# Altium PCB PCB1.PcbDoc
Units mil, origin at the board's own origin, x right, y up, seen from the top; angles counter-clockwise.
Board outline 4135 x 5145 mil, 2 copper layers (Top Layer, Bottom Layer); 112 components, 91 nets, 432 pads, 86 vias.
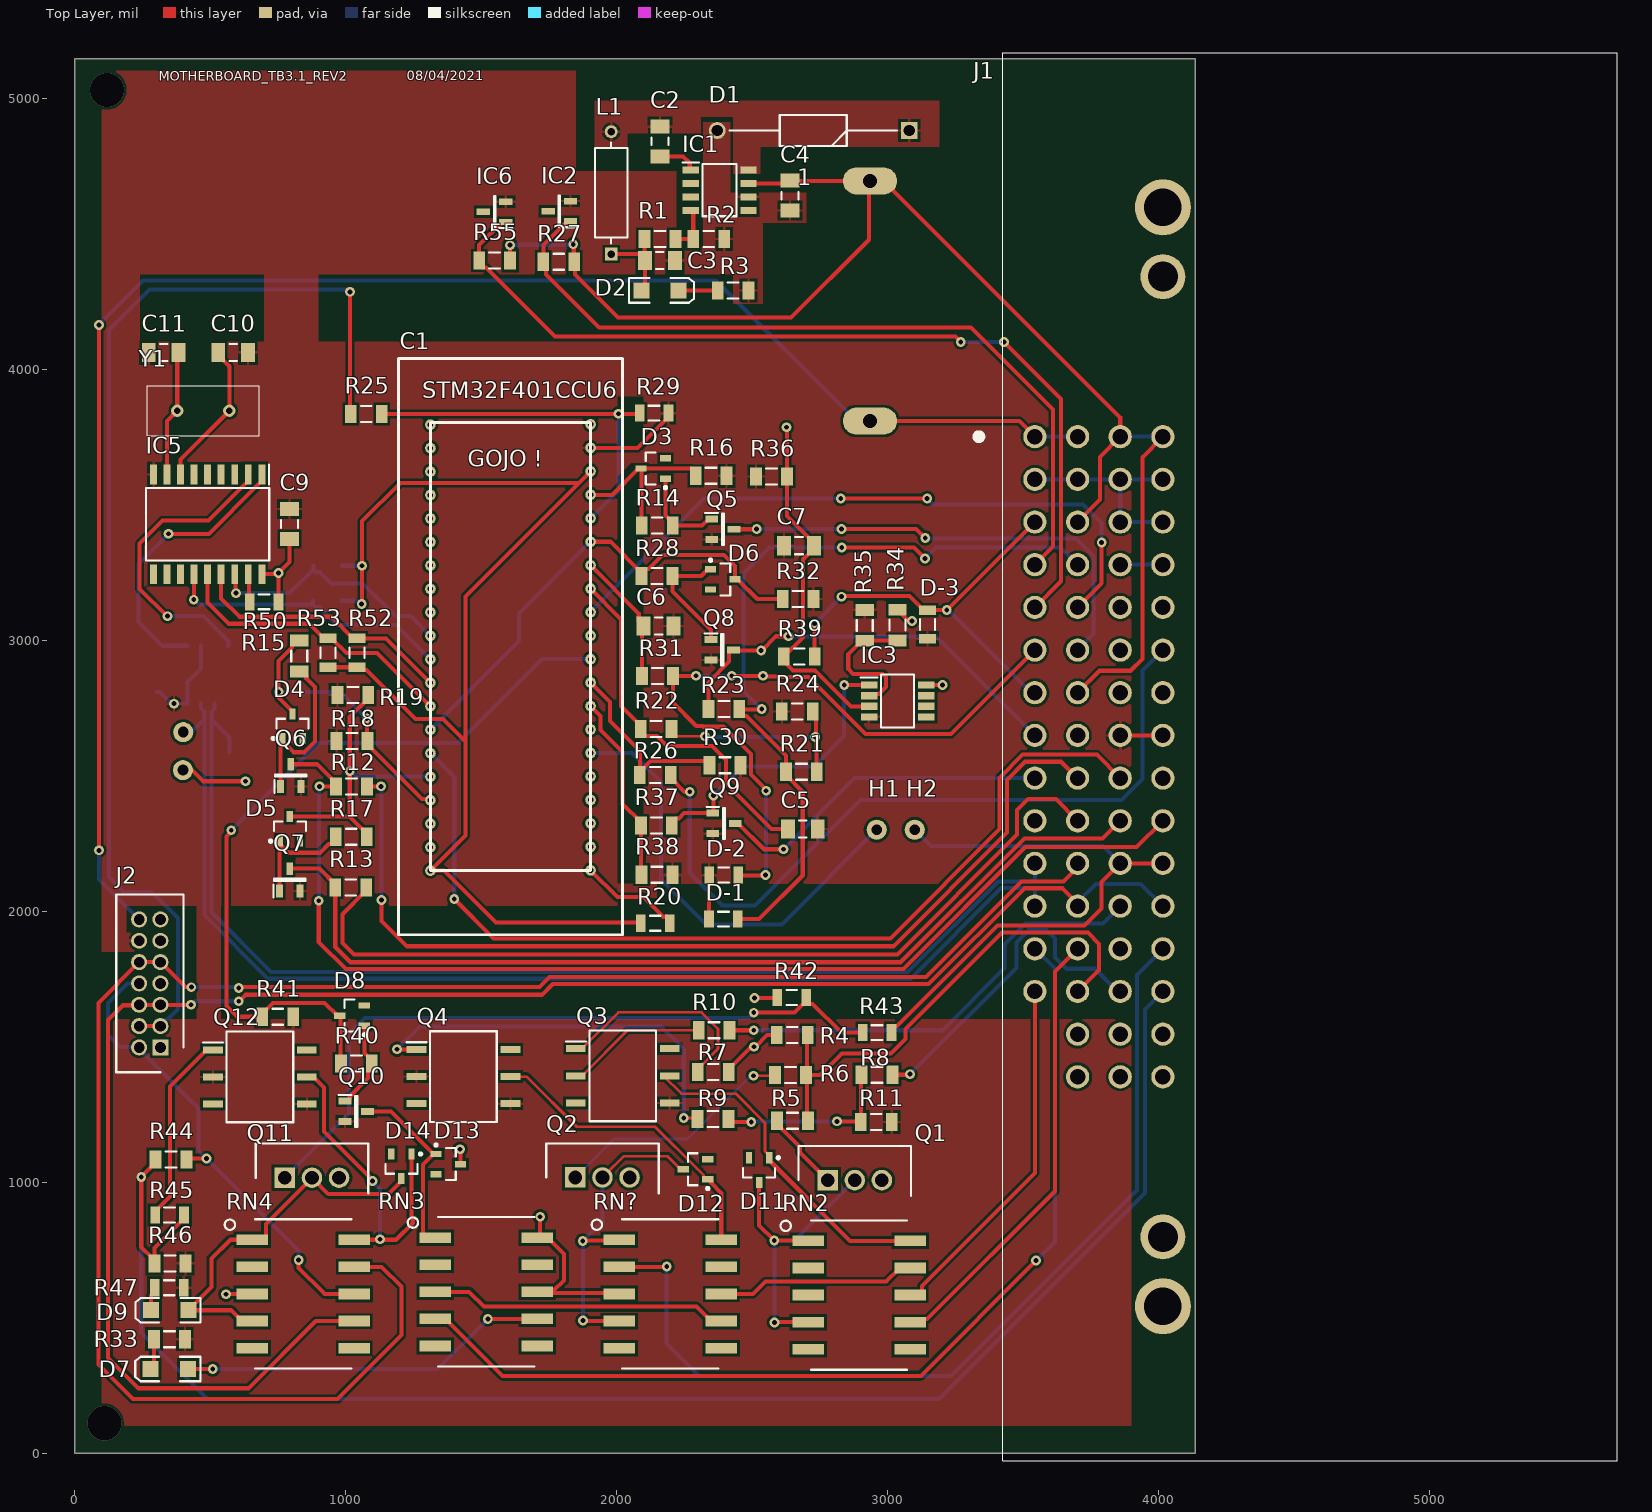
[diagram p0: Top Layer view]
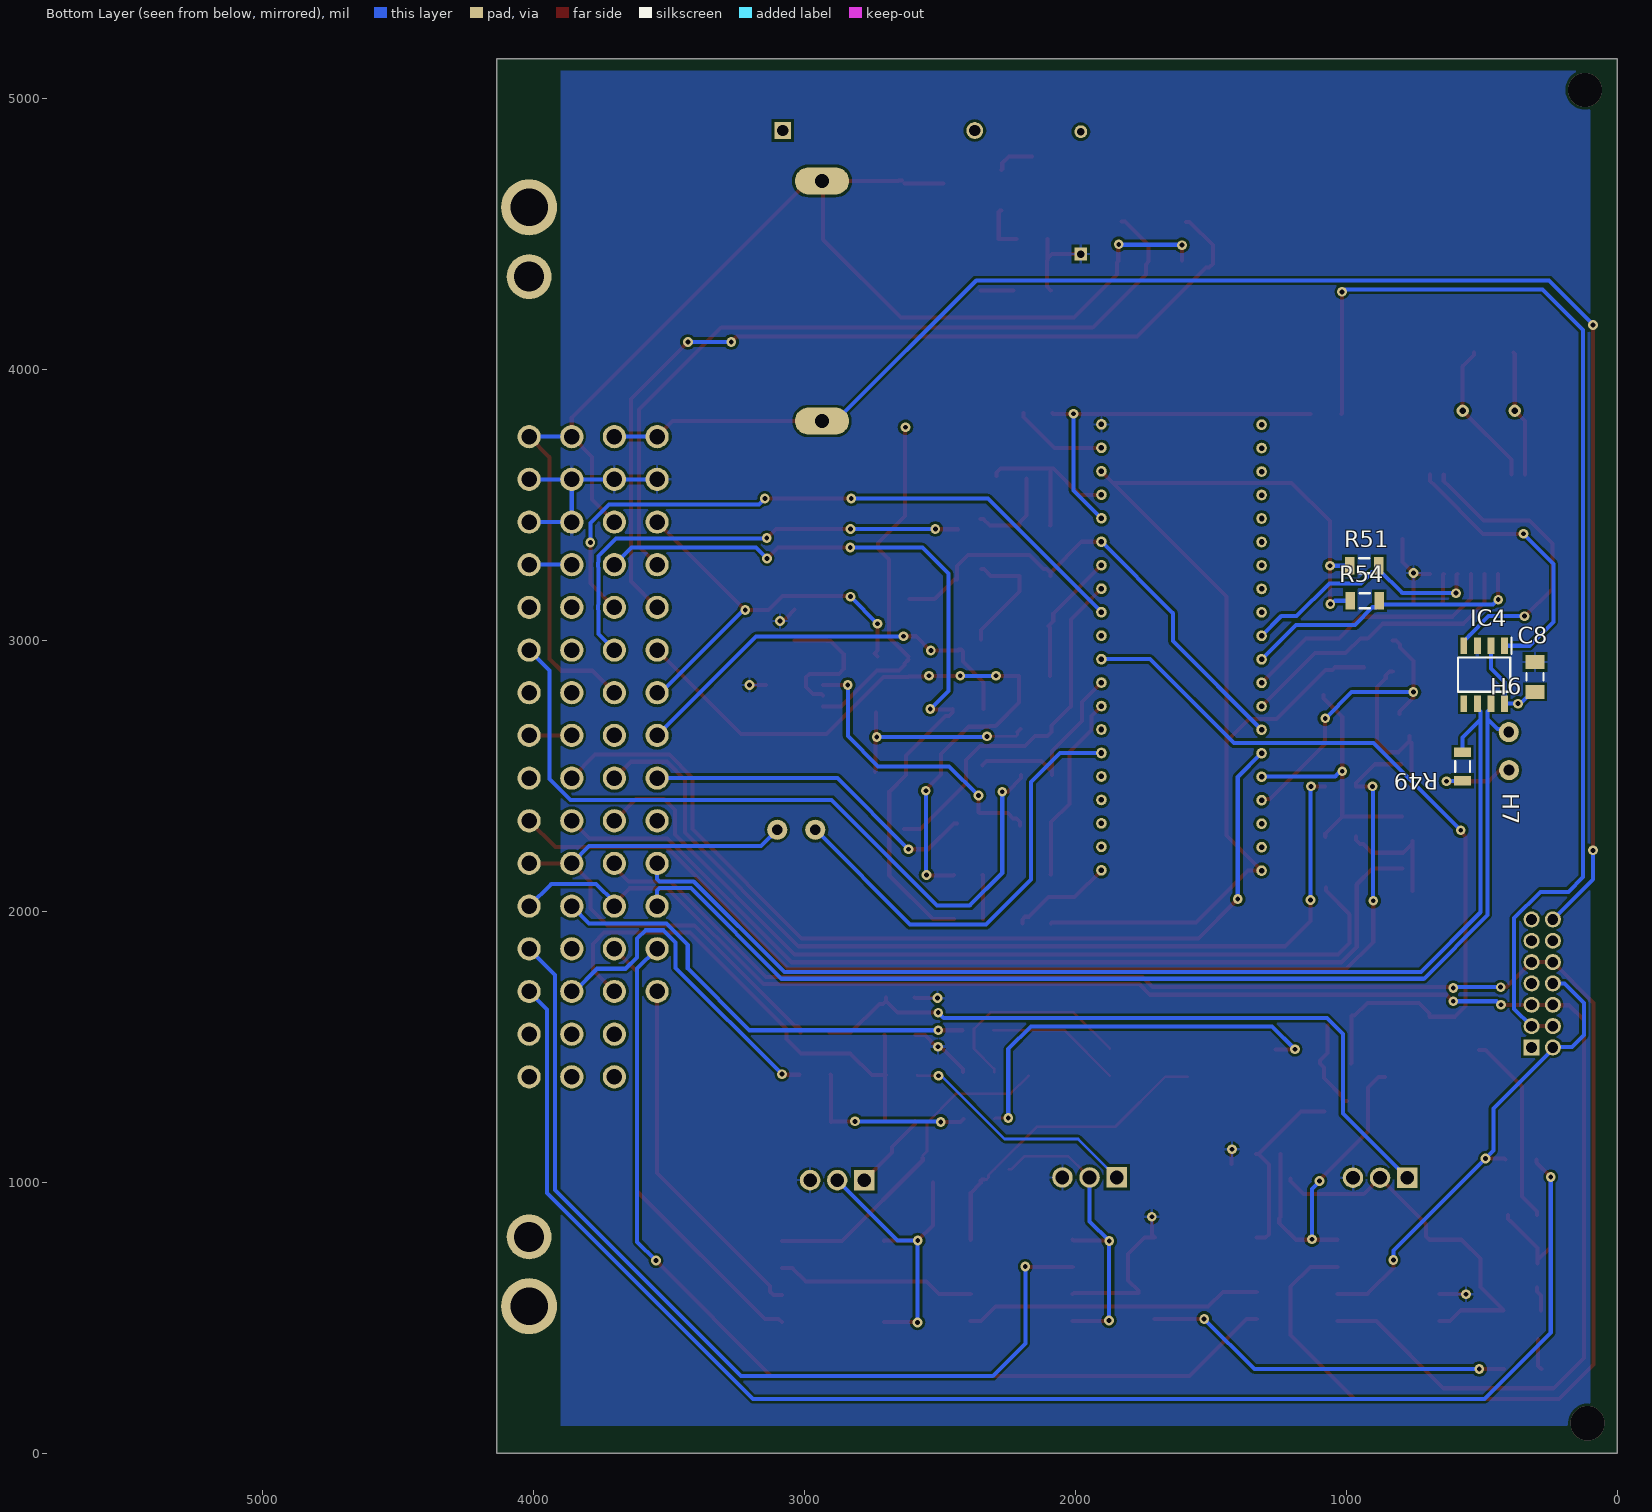
[diagram p1: Bottom Layer view, seen from below]

## Layer stack, top to bottom
Top Solder: solder mask 0.4, Solder Resist, Dk 3.5
Top Layer: signal copper 1.4
Dielectric 1: dielectric 12.6, FR-4, Dk 4.8
Bottom Layer: signal copper 1.4
Bottom Solder: solder mask 0.4, Solder Resist, Dk 3.5

## Board outline
0,0 4135,0 4135,5145 0,5145

## Design rules (kind name [scope] priority, off if disabled: settings)
Clearance [All] p1: gap=10 ignorepadtopadclearanceinfootprint=FALSE except(0: Arc-Hole Track-Hole SMDPad-Hole THPad-Hole Via-Hole Fill-Hole Poly-Hole Region-Hole Text-Hole)
ComponentClearance [All] p1: gap=0 collisioncheckmode=3 verticalgap=0 showdistances=TRUE
DiffPairsRouting [All] p1: maxlimit=10 minlimit=10 mostfreqgap=10 toplayer_minwidth=15 toplayer_maxwidth=15 toplayer_prefwidth=15 bottomlayer_minwidth=15 bottomlayer_maxwidth=15 bottomlayer_prefwidth=15 maxuncoupledlength=500
Height [All] p1: minheight=0 maxheight=5000 prefheight=500
HoleSize [All] p1: absolutevalues=TRUE maxlimit=500 minlimit=1 maxpercent=80.000 minpercent=20.000
MinimumSolderMaskSliver [All] p1: minsoldermaskwidth=0
PolygonConnect [All] p1: connectstyle=Relief reliefconductorwidth=10 reliefentries=4 polygonreliefangle="90 Angle" airgapwidth=10
RoutingVias [All] p1: holewidth=18 width=30 viastyle="Through Hole" minholewidth=15 minwidth=30 maxholewidth=18 maxwidth=36
SilkToSilkClearance [All] p1: silktosilkclearance=0
SilkToSolderMaskClearance [IsPad] p1: minsilkscreentomaskgap=0 clearancetoexposedcopper=TRUE
SolderMaskExpansion [All] p1: expansion=4 istentingtop=FALSE
Width [All] p1: maxlimit=15 minlimit=10 preferedwidth=15
23 further rules are at their usual default settings.

## Classes and differential pairs
component class Sheet5: C8 C9 C10 C11 H6 H7 IC4 IC5 R49 R50 R51 R52 R53 R54 Y1
component class Sheet4: J1 J2
component class Sheet3: C7 D7 D8 D9 D13 D14 D-3 IC3 Q9 Q10 Q11 Q12 R33 R34 R35 R36 R37 R38 R39 R40 R41 R42 R43 R44 R45 R46 R47 RN3 RN4
component class Sheet2: C1 C5 C6 D3 D4 D5 D6 D-1 D-2 H1 H2 IC2 IC6 Q5 Q6 Q7 Q8 R12 R13 R14 R15 R16 R17 R18 R19 R20 R21 R22 R23 R24 R25 R26 R27 R28 R29 R30 R31 R32 R55
component class Sheet1: 1 C2 C3 C4 D1 D2 D11 D12 IC1 L1 Q1 Q2 Q3 Q4 R1 R2 R3 R4 R5 R6 R7 R8 R9 R10 R11 RN2 RN?
differential pair DIFF: +DIFF_P -DIFF_N

## Components (designator, comment, footprint, x,y, rotation, side; value= is the part's Value field where it differs from the comment)
1 "fuse" fuse 2935,4235 r270 top
C1 "Component_1" PCBComponent_1 1510,3094.09 r0 top
C2 "0.01uF" KEMT-1206-2_N 2160,4840 r270 top
C3 "220uF" KEMT-1206-2_N 2160,4400 r0 top
C4 "10uF" KEMT-1206-2_N 2640,4640 r270 top
C5 "C1206C104K5RACTU" KEMT-1206-2_N 2687.12,2303 r180 top
C6 "C1206C104K5RACTU" KEMT-1206-2_N 2155,3052 r180 top
C7 "0.1uF" KEMT-1206-2_N 2673,3348 r0 top
C8 "100nF" KEMT-1206-2_N 304,2864 r270 bottom
C9 "10uF" KEMT-1206-2_N 793,3428.12 r90 top
C10 "22pF" KEMT-1206-2_N 585.12,4061 r0 top
C11 "22pF" KEMT-1206-2_N 329,4061 r180 top
D1 "1N5819" DIOAD1796W86L628D292 3080,4880 r180 top
D2 "LED2" 3.2X1.6X1.1 2160,4290 r0 top
D3 "BAT54" INF-SOT23_N 2135.28,3633 r180 top
D4 "BAT54" INF-SOT23_N 804,2682 r90 top
D5 "BAT54" INF-SOT23_N 794.4,2303.28 r90 top
D6 "BAT54" INF-SOT23_N 2392,3224 r0 top
D7 "LED2" 3.2X1.6X1.1 350,310 r180 top
D8 "BAT54" INF-SOT23_N 1024,1614 r180 top
D9 "LED2" 3.2X1.6X1.1 351,527 r180 top
D11 "BAT54" INF-SOT23_N 2526,1044 r270 top
D12 "BAT54" INF-SOT23_N 2291,1047 r180 top
D13 "BAT54" INF-SOT23_N 1379,1066 r0 top
D14 "BAT54" INF-SOT23_N 1206,1058 r270 top
D-1 "TPD1E6B06DPLR" R1206 2394,1970 r180 top
D-2 "TPD1E6B06DPLR" R1206 2395,2133 r180 top
D-3 "TPD1E6B06DPLR" R1206 3147,3057 r270 top
H1 "Header" Header 2959.78,2300.11 r0 top
H2 "Header" Header 3100,2300 r0 top (schematic designator H?)
H6 "Header" Header 400.89,2660.22 r270 bottom
H7 "Header" Header 399.89,2520.22 r270 bottom
IC1 "TPS5430DDARG4" SOIC127P600X175-8N 2380,4660 r0 top
IC2 "LM4040B82BZT" SOT95P237X112-3N 1788.66,4582.4 r180 top
IC3 "LM358" SOP100P600X150-8N 3037,2775 r0 top
IC4 "TJA1050T" SOIC127P600X175-8N 492,2872 r270 bottom
IC5 "MCP2515-I_SO" SOIC127P1030X265-18N 491,3427.06 r270 top
IC6 "LM4040B82BZT" SOT95P237X112-3N 1550,4580 r180 top
J1 "1-1418362-3" 114183623 3543.56,3750.4 r270 top
J2 "87831-1420" SHDR14W55P200_2X7_1665X630X640P 317,1496.52 r90 top
L1 "15uH" FP-IR02-MFG 1980,4650 r90 top value=10uH
Q1 "IRF4905PBF" TO254P469X1042X1967-3P 2779,1007 r0 top
Q2 "IRF4905PBF" TO254P469X1042X1967-3P 1848,1017 r0 top
Q3 "MCT2ESM" SOT254P916X480-6N 2023,1392 r0 top
Q4 "MCT2ESM" SOT254P916X480-6N 1435,1389 r0 top
Q5 "2N7002" SOT96P240X120-3N 2392.34,3408.8 r0 top
Q6 "2N7002" SOT96P240X120-3N 797.8,2500.34 r90 top
Q7 "2N7002" SOT96P240X120-3N 794,2115 r90 top
Q8 "2N7002" SOT96P240X120-3N 2390,2964 r0 top
Q9 "2N7002" SOT96P240X120-3N 2396.34,2323.2 r0 top
Q10 "2N7002" SOT96P240X120-3N 1039.34,1260.8 r0 top
Q11 "IRF4905PBF" TO254P469X1042X1967-3P 776,1016 r0 top
Q12 "MCT2ESM" SOT254P916X480-6N 684,1388 r0 top
R1 "10k" "RESC3216X60X45NL10T20 - duplicate" 2160,4480 r180 top
R2 "3.24k" "RESC3216X60X45NL10T20 - duplicate" 2340,4480 r180 top
R3 "220R" "RESC3216X60X45NL10T20 - duplicate" 2430,4290 r180 top
R4 "3.3k" "RESC3216X60X45NL10T20 - duplicate" 2648,1542 r180 top
R5 "0R" "RESC3216X60X45NL10T20 - duplicate" 2649,1226 r0 top
R6 "0R" "RESC3216X60X45NL10T20 - duplicate" 2641.91,1395 r0 top
R7 "220R" "RESC3216X60X45NL10T20 - duplicate" 2357,1406 r0 top
R8 "680R" "RESC3216X60X45NL10T20 - duplicate" 2961,1396 r0 top
R9 "220R" "RESC3216X60X45NL10T20 - duplicate" 2356,1233 r0 top
R10 "0R" "RESC3216X60X45NL10T20 - duplicate" 2360,1560 r0 top
R11 "3.3k" "RESC3216X60X45NL10T20 - duplicate" 2958,1221 r180 top
R12 "100k" "RESC3216X60X45NL10T20 - duplicate" 1022,2460 r0 top
R13 "100k" "RESC3216X60X45NL10T20 - duplicate" 1019,2087 r0 top
R14 "220R" "RESC3216X60X45NL10T20 - duplicate" 2150,3422 r180 top
R15 "220R" "RESC3216X60X45NL10T20 - duplicate" 829,2941 r90 top
R16 "10k" "RESC3216X60X45NL10T20 - duplicate" 2348.91,3606 r180 top
R17 "220R" "RESC3216X60X45NL10T20 - duplicate" 1021,2274 r0 top
R18 "10k" "RESC3216X60X45NL10T20 - duplicate" 1024,2627 r0 top
R19 "10k" "RESC3216X60X45NL10T20 - duplicate" 1027,2797 r0 top
R20 "0R" R1206 2143,1955 r0 top
R21 "10k" "RESC3216X60X45NL10T20 - duplicate" 2682,2514 r180 top
R22 "4.7k" "RESC3216X60X45NL10T20 - duplicate" 2146,2672 r0 top
R23 "100k" "RESC3216X60X45NL10T20 - duplicate" 2396,2745 r0 top
R24 "10k" "RESC3216X60X45NL10T20 - duplicate" 2667,2736 r0 top
R25 "1k" "RESC3216X60X45NL10T20 - duplicate" 1076,3834 r180 top
R26 "1k" "RESC3216X60X45NL10T20 - duplicate" 2143,2502 r0 top
R27 "220R" "RESC3216X60X45NL10T20 - duplicate" 1787,4396 r0 top
R28 "10R" "RESC3216X60X45NL10T20 - duplicate" 2149,3236 r180 top
R29 "470R" R1206 2138,3837 r180 top
R30 "470R" "RESC3216X60X45NL10T20 - duplicate" 2400,2538 r180 top
R31 "4.7k" "RESC3216X60X45NL10T20 - duplicate" 2151,2867 r0 top
R32 "10k" "RESC3216X60X45NL10T20 - duplicate" 2670,3151 r180 top
R33 "CRCW120647K0FKEA" "RESC3216X60X45NL10T20 - duplicate" 350,420 r180 top
R34 "9k" "RESC3216X60X45NL10T20 - duplicate" 3036,3055 r90 top
R35 "1k" "RESC3216X60X45NL10T20 - duplicate" 2916,3054.09 r270 top
R36 "100R" "RESC3216X60X45NL10T20 - duplicate" 2572,3603 r0 top
R37 "1k" "RESC3216X60X45NL10T20 - duplicate" 2146.91,2316 r0 top
R38 "470R" "RESC3216X60X45NL10T20 - duplicate" 2149,2134 r180 top
R39 "4.7k" "RESC3216X60X45NL10T20 - duplicate" 2674,2939 r0 top
R40 "220R" "RESC3216X60X45NL10T20 - duplicate" 1040,1437 r180 top
R41 "10k" "RESC3216X60X45NL10T20 - duplicate" 750,1610 r180 top
R42 "10k" R1206 2646,1681 r180 top
R43 "220R" R1206 2961,1551 r180 top
R44 "680R" "RESC3216X60X45NL10T20 - duplicate" 356,1083 r0 top
R45 "220R" R1206 351,878 r0 top
R46 "3.3k" "RESC3216X60X45NL10T20 - duplicate" 352,700 r180 top
R47 "220R" R1206 350,610 r0 top
R49 "220R" R1206 571,2533 r270 bottom
R50 "4.7k" R1206 699,3141 r180 top
R51 "4.7k" R1206 934,3274 r180 bottom
R52 "4.7k" R1206 1042,2953 r90 top
R53 "4.7k" R1206 935,2953 r90 top
R54 "4.7k" R1206 932,3145 r180 bottom
R55 "220R" "RESC3216X60X45NL10T20 - duplicate" 1550,4400 r0 top
RN2 "relay" relaytq 2894,586 r270 top
RN3 "relay" relaytq 1518,598 r270 top
RN4 "relay" relaytq 843,590 r270 top
RN? "relay" relaytq 2197,590 r270 top
Y1 "ECS-160-18-4X-CKM" ECS160184XCKM 571,3846 r180 top

## Footprints (in the part's own frame and the unit in brackets; to place one, negate y for a bottom-side part, rotate by r counter-clockwise, add the part's x,y. Pads: shape width x height; smd on the part's side, far side on the other; paste and mask are expansions set on the pad)
3.2X1.6X1.1 [mm] "SMT LED; 2 Flat Leads"
  rect 1.5x1.5 smd: 1(-1.75,0) 2(1.75,0)
  silkscreen extent -2.9,-1.15 3.2,1.15
114183623 [mm]
  round 2.175 hole 1.45: 1(0,0) 2(0,4) 3(0,8) 4(0,12) 5(4,0) 6(4,8) 7(4,4) 8(4,12) 9(8,0) 10(8,4) 11(8,8) 12(8,12) 13(12,0) 14(12,4) 15(12,8) 16(12,12) 17(16,0) 18(16,4) 19(16,8) 20(16,12) 21(20,0) 22(20,4) 23(20,8) 24(20,12) 25(24,0) 26(24,4) 27(24,8) 28(24,12) 29(28,0) 30(28,4) 31(28,8) 32(28,12) 33(32,0) 34(32,4) 35(32,8) 36(32,12) 37(36,0) 38(36,4) 39(36,8) 40(36,12) 41(40,0) 42(40,4) 43(40,8) 44(40,12) 45(44,0) 46(44,4) 47(44,8) 48(44,12) 49(48,0) 50(48,4) 51(48,8) 52(48,12) 53(52,0) 54(52,4) 55(52,8) 56(52,12) 57(56,4) 58(56,8) 59(56,12) 60(60,4) 61(60,8) 62(60,12)
  round 4.2 hole 2.8: MH1(75,12) MH2(-15,12)
  round 5.25 hole 3.5: MH3(81.5,12) MH4(-21.5,12)
  silkscreen extent -36,-5.5 96,54.6, body extent -35.38,-1.91 96.62,55.69, height 36.76
DIOAD1796W86L628D292 [mm]
  rect 1.575x1.575 hole 1.05: 1(0,0)
  round 1.575 hole 1.05: 2(18,0)
  silkscreen extent 1.14,-1.46 16.86,1.46, body extent -0.43,-1.52 18.4,1.52, height 3.04
ECS160184XCKM [mm]
  round 1.155 hole 0.63: 1(0,0) 2(4.88,0)
  silkscreen extent -2.81,-2.32 7.69,2.32, body extent -2.81,-2.32 7.69,2.32, height 3.6
FP-IR02-MFG [mm]
  rect 1.2x1.2 hole 0.7 paste-1000 mask+0: 1(-5.736,0)
  round 1.2 hole 0.7 paste-1000 mask+0: 2(5.736,0)
  silkscreen extent -4.74,-1.53 4.74,1.53, body extent -6.44,-1.63 6.44,1.63, height 0.25
fuse [mil]
  oval 100x200 hole 52: 1(427,0) 2(-459,0)
Header [mil]
  round 74 hole 40: 1(0.22,-0.11)
INF-SOT23_N [mm] "SOT23, 3-Leads, Body 2.9x1.3 mm, Pitch 0.95 mm, IPC Medium Density"
  rect 1.05x0.6 smd: 1(-1.15,0.95) 2(-1.15,-0.95) 3(1.15,0)
  silkscreen extent -1.28,-1.5 0.7,1.92, body extent -0.7,-1.5 0.7,1.5, height 1.1
KEMT-1206-2_N [mm] "SMD, 2-Leads, Body 3.4x1.8mm, IPC Medium Density"
  rect 1.3x1.8 smd: 1(-1.4,0) 2(1.4,0)
  silkscreen extent -0.35,-0.8 0.35,0.8, body extent -1.7,-0.9 1.7,0.9, height 0.88
PCBComponent_1 [mm]
  round 1 hole 0.52: 1(-5,17.8) 2(-5,15.6) 3(-5,13.4) 4(-5,11.2) 5(-5,9) 6(-5,6.8) 7(-5,4.6) 8(-5,2.4) 9(-5,0.2) 10(-5,-2) 11(-5,-4.2) 12(-5,-6.4) 13(-5,-8.6) 14(-5,-10.8) 15(-5,-13) 16(-5,-15.2) 17(-5,-17.4) 18(-5,-19.6) 19(-5,-21.8) 20(-5,-24) 21(10.008,-23.978) 22(10.008,-21.778) 23(10.008,-19.578) 24(10.008,-17.378) 25(10.008,-15.178) 26(10.008,-12.978) 27(10.008,-10.778) 28(10.008,-8.578) 29(10.008,-6.378) 30(10.008,-4.178) 31(10.008,-1.978) 32(10.008,0.222) 33(10.008,2.422) 34(10.008,4.622) 35(10.008,6.822) 36(10.008,9.022) 37(10.008,11.222) 38(10.008,13.422) 39(10.008,15.622) 40(10.008,17.822)
  silkscreen extent -8,-30 13,24
R1206 [mm]
  rect 0.9x1.6 smd: 1(-1.357,0) 2(1.343,0)
  silkscreen extent -0.51,-0.7 0.49,0.7, body extent -1.66,-0.85 1.64,0.85, height 0.6
relaytq [mm]
  rect 1x2.94 smd: 1(-5.004,-4.755) 5(5.156,-4.755) 6(5.156,4.805) 10(-5.004,4.805) NC1(-2.464,-4.755) NC2(-2.464,4.805) NO1(2.616,-4.755) NO2(2.616,4.805) POLE1(0.076,-4.755) POLE2(0.076,4.805)
  silkscreen extent -6.92,-7.33 7.08,4.53
"RESC3216X60X45NL10T20 - duplicate" [mm] "Chip Resistor, 2-Leads, Body 3.20x1.60mm, IPC Medium Density"
  rect 1.1x1.7 smd: 1(-1.45,0) 2(1.45,0)
  silkscreen extent -0.5,-0.75 0.5,0.75, body extent -1.65,-0.85 1.65,0.85, height 0.6
SHDR14W55P200_2X7_1665X630X640P [mm]
  rect 1.5x1.5 hole 1: 1(0,0)
  round 1.5 hole 1: 2(0,2) 3(2,0) 4(2,2) 5(4,0) 6(4,2) 7(6,0) 8(6,2) 9(8,0) 10(8,2) 11(10,0) 12(10,2) 13(12,0) 14(12,2)
  silkscreen extent -2.32,-2.15 14.33,4.15, body extent -2.32,-2.15 14.33,4.15, height 6.4
SOIC127P600X175-8N [mm]
  rect 1.525x0.65 smd: 1(-2.712,1.905) 2(-2.712,0.635) 3(-2.712,-0.635) 4(-2.712,-1.905) 5(2.712,-1.905) 6(2.712,-0.635) 7(2.712,0.635) 8(2.712,1.905)
  silkscreen extent -3.47,-2.45 1.6,2.58, body extent -3,-2.45 3,2.45, height 1.75
SOIC127P1030X265-18N [mm]
  rect 1.85x0.65 smd: 1(-4.675,5.08) 2(-4.675,3.81) 3(-4.675,2.54) 4(-4.675,1.27) 5(-4.675,0) 6(-4.675,-1.27) 7(-4.675,-2.54) 8(-4.675,-3.81) 9(-4.675,-5.08) 10(4.675,-5.08) 11(4.675,-3.81) 12(4.675,-2.54) 13(4.675,-1.27) 14(4.675,0) 15(4.675,1.27) 16(4.675,2.54) 17(4.675,3.81) 18(4.675,5.08)
  silkscreen extent -5.6,-5.77 3.4,5.77, body extent -5.15,-5.77 5.15,5.78, height 2.65
SOP100P600X150-8N [mm]
  rect 1.55x0.7 smd: 1(-2.675,1.5) 2(-2.675,0.5) 3(-2.675,-0.5) 4(-2.675,-1.5) 5(2.675,-1.5) 6(2.675,-0.5) 7(2.675,0.5) 8(2.675,1.5)
  silkscreen extent -3.45,-2.5 1.55,2.5, body extent -3,-2.5 3,2.5, height 1.62
SOT95P237X112-3N [mm]
  rect 1.25x0.6 smd: 1(-1.05,0.95) 2(-1.05,-0.95) 3(1.05,0)
  silkscreen extent -1.68,-1.46 0.08,1.5, body extent -1.18,-1.46 1.18,1.46, height 1.12
SOT96P240X120-3N [mm]
  rect 1.2x0.65 smd: 1(-1.05,0.96) 2(-1.05,-0.96) 3(1.05,0)
  silkscreen extent -1.65,-1.45 0.1,1.54, body extent -1.2,-1.45 1.2,1.45, height 1.2
SOT254P916X480-6N [mm]
  rect 1.85x0.65 smd: 1(-4.4,2.54) 2(-4.4,0) 3(-4.4,-2.54) 4(4.4,-2.54) 5(4.4,0) 6(4.4,2.54)
  silkscreen extent -5.33,-4.26 3.13,4.26, body extent -4.58,-4.26 4.58,4.26, height 4.8
TO254P469X1042X1967-3P [mm]
  rect 1.92x1.92 hole 1.28: 1(0,0)
  round 1.92 hole 1.28: 2(2.54,0) 3(5.08,0)
  silkscreen extent -2.73,-1.5 7.81,3.19, body extent -2.67,-1.5 7.75,3.19, height 18.84

## Part data
C2 C3 C4 C5 C6 C8 C9 C10 C11: library part CMP-1037-04202-2, "CAP, Ceramic, 0.1 uF, +/- 10%, 50 V, -55 to 125 degC, 1206 (3216 Metric), RoHS, Tape and Reel", Capacitance=0.1µF, Capacitance Tolerance=±10%, Capacitor Case Style=1206[3216Metric], Dielectric Characteristic=X7R, Manufacturer=Kemet, Operating Temperature Max=125degC, Operating Temperature Min=-55degC, Package Description="2-Leads SMD, Body 3.2 x 1.6 mm", Package Reference=1206-2, Voltage Rating=50V, Datasheet URL=https://datasheet.ciiva.com/6125/1725438-6125494.pdf, Datasheet Version=Jul-13, Manufacturer URL=http://www.kemet.com/, Packaging=Tape&Reel, Product Range=KEMET-CSeries, SVHC=ToBeAdvised
C7: library part CAPACITOR, "CAP, Ceramic, 0.1 uF, +/- 10%, 50 V, -55 to 125 degC, 1206 (3216 Metric), RoHS, Tape and Reel", Capacitance=0.1µF, Capacitance Tolerance=±10%, Capacitor Case Style=1206[3216Metric], Dielectric Characteristic=X7R, Manufacturer=Kemet, Operating Temperature Max=125degC, Operating Temperature Min=-55degC, Package Description="2-Leads SMD, Body 3.2 x 1.6 mm", Package Reference=1206-2, Voltage Rating=50V, Datasheet URL=https://datasheet.ciiva.com/6125/1725438-6125494.pdf, Datasheet Version=Jul-13, Manufacturer URL=http://www.kemet.com/, Packaging=Tape&Reel, Product Range=KEMET-CSeries, SVHC=ToBeAdvised
D1: "Schottky Diode", Manufacturer_Name=NEUTRAL, Datasheet Link=http://uk.rs-online.com/web/p/products/1124416, Manufacturer_Part_Number=1N5819
D2 D7 D9: "Typical RED, GREEN, YELLOW, AMBER GaAs LED", LatestRevisionDate=17-Jul-2002, LatestRevisionNote="Re-released for DXP Platform.", PackageDescription="SM LED; 2 Flat Leads", PackageReference=3.2X1.6X1.1, PackageVersion=Feb-2002, Published=8-Jun-2000, Publisher="Altium Limited"
D3 D4 D5 D6 D8 D11 D12 D13 D14: library part CMP-1182-00010-1, "Silicon Schottky Diode, SOT23, Reel, Green", Manufacturer=Infineon, ComponentLink1Description="Manufacturer URL", ComponentLink1URL=http://www.infineon.com/, ComponentLink2Description=Datasheet, ComponentLink2URL=http://www.infineon.com/dgdl/bat54series.pdf?folderId=db3a30431400ef68011425f1ca2505e3&fileId=db3a304314dca3890115190b74210ea6, ComponentLink3Description="Package Specification", ComponentLink3URL=http://www.infineon.com/dgdl/SOT23-Package_Overview.pdf?folderId=db3a30431936bc4b0119532290053c66&fileId=db3a30431936bc4b0119533468123c85, Configuration=Single, CT (max)="10Â pF", Green=TRUE, IF (max)="200Â mA", Mounting Technology="Surface Mount", PackageDescription="3-Pin Small Outline Transistor Package, 1.3 x 2.9 mm Body, 0.95 mm Pitch", PackageReference=SOT23, PackageVersion=Apr-08, Packing=Reel, PartNumber=BAT54, VF (max)="800Â mV", VR (max)="30Â V"
IC1: "Integrated Circuit", Manufacturer_Name="Texas Instruments", Mouser Part Number=595-TPS5430DDARG4, Datasheet Link=http://www.ti.com/general/docs/suppproductinfo.tsp?distId=10&gotoUrl=http%3A%2F%2Fwww.ti.com%2Flit%2Fgpn%2Ftps5431, Height=1.7mm, Manufacturer_Part_Number=TPS5430DDARG4, Mouser Price/Stock=https://www.mouser.co.uk/ProductDetail/Texas-Instruments/TPS5430DDARG4?qs=zwk82MlA57YG4K%2FfUMTveg%3D%3D
IC2 IC6: library part LM4040B25IDBZT, "Integrated Circuit", Manufacturer_Name="Texas Instruments", Mouser Part Number=595-LM4040B25IDBZT, Arrow Part Number=LM4040B25IDBZT, Arrow Price/Stock=https://www.arrow.com/en/products/lm4040b25idbzt/texas-instruments, Datasheet Link=https://www.ti.com/lit/gpn/LM4040, Height=1.12mm, Manufacturer_Part_Number=LM4040B25IDBZT, Mouser Price/Stock=https://www.mouser.com/Search/Refine.aspx?Keyword=595-LM4040B25IDBZT
IC3: "Integrated Circuit", Manufacturer_Name=IDCHIP, Datasheet Link=https://datasheet.lcsc.com/szlcsc/1902201702_IDCHIP-LM358_C329455.pdf, Height=1.5mm, Manufacturer_Part_Number=LM358
IC4: "Integrated Circuit", Manufacturer_Name=Nexperia, Mouser Part Number=N/A, Datasheet Link=http://docs-emea.rs-online.com/webdocs/0425/0900766b80425301.pdf, Height=1.75mm, Manufacturer_Part_Number=TJA1050T, Mouser Price/Stock=https://www.mouser.com/Search/Refine.aspx?Keyword=N%2FA
IC5: "Integrated Circuit", Arrow Part Number=MCP2515-I/SO, Manufacturer_Name=Microchip, Mouser Part Number=579-MCP2515-I/SO, Arrow Price/Stock=https://www.arrow.com/en/products/mcp2515-iso/microchip-technology?region=nac, Datasheet Link=http://ww1.microchip.com/downloads/en/DeviceDoc/21801G.pdf, Height=2.65mm, Manufacturer_Part_Number=MCP2515-I/SO, Mouser Price/Stock=https://www.mouser.co.uk/ProductDetail/Microchip-Technology/MCP2515-I-SO?qs=KwArPi4cUogGDbGnphOvtQ%3D%3D
J1: "Connector", Manufacturer_Name="TE Connectivity", Mouser Part Number=571-1-1418362-3, Arrow Part Number=1-1418362-3, Arrow Price/Stock=https://www.arrow.com/en/products/1-1418362-3/te-connectivity, Datasheet Link=https://www.arrow.com/en/products/1-1418362-3/te-connectivity, Height=48mm, Manufacturer_Part_Number=1-1418362-3, Mouser Price/Stock=https://www.mouser.co.uk/ProductDetail/TE-Connectivity-AMP/1-1418362-3?qs=J7fCQMU5Gej7aVw8AejcvQ%3D%3D
J2: "Connector", Manufacturer_Name=Molex, Mouser Part Number=538-87831-1420, Datasheet Link=http://docs-emea.rs-online.com/webdocs/150d/0900766b8150deae.pdf, Height=6.4mm, Manufacturer_Part_Number=87831-1420, Mouser Price/Stock=https://www.mouser.co.uk/ProductDetail/Molex/87831-1420/?qs=QtQX4uD3c2VDCL534TqpVg%3D%3D
L1: library part CMP-03630-000001-1, "IR-2 10 10% B08", Inductance=10uH, Manufacturer="Vishay Dale", Manufacturer Part Number=IR02BH100K, Package=IR02, Saturation Current=130mA, Self Resonant Frequency=50MHz, Series Resistance=3.7Ω, Temperature="-55°C to +105°C", Temperature Range High=+105°C, Temperature Range Low=-55°C, Test Frequency=7.9MHz, Tolerance=10%, Automotive=No, Category=Ind, ComponentLink2Description=Datasheet, ComponentLink2URL=https://datasheet.ciiva.com/8536/ir-8536517.pdf, Core Material=Iron, Device Class L1="Passive Components", Device Class L2=Inductors, Device Class L3="Fixed Inductors", Digikey Description="IR-2 10 10% B08", Height=3.05mm, Ipc Land Pattern Name=CAPAD1147W70L838D305, Lead Free=Yes, Mouser Description="Fixed Inductors 10uH 10%", Obsolete Part=true, Octopart=https://octopart.com/ir02bh100k-vishay+dale-39675774, Q Factor=55, RoHS=TRUE
Q1 Q2 Q11: "MOSFET (P-Channel)", Manufacturer_Name=Infineon, Mouser Part Number=942-IRF4905PBF, Arrow Part Number=IRF4905PBF, Arrow Price/Stock=https://www.arrow.com/en/products/irf4905pbf/infineon-technologies-ag, Datasheet Link=http://docs-emea.rs-online.com/webdocs/0791/0900766b807910f2.pdf, Height=4.69mm, Manufacturer_Part_Number=IRF4905PBF, Mouser Price/Stock=https://www.mouser.co.uk/ProductDetail/Infineon-IR/IRF4905PBF/?qs=9%252BKlkBgLFf39l0HsWdxvdw%3D%3D
Q3 Q4 Q12: "Phototransistor", Manufacturer_Name="ON Semiconductor", Mouser Part Number=512-MCT2ESM, Arrow Part Number=MCT2ESM, Arrow Price/Stock=https://www.arrow.com/en/products/mct2esm/on-semiconductor, Datasheet Link=https://www.onsemi.com/pub/Collateral/MCT2EM-D.PDF, Height=4.8mm, Manufacturer_Part_Number=MCT2ESM, Mouser Price/Stock=https://www.mouser.co.uk/ProductDetail/ON-Semiconductor-Fairchild/MCT2ESM/?qs=nW0pe8qlIZjLnc6UyUzYTw%3D%3D
Q5 Q6 Q7 Q8 Q9 Q10: "MOSFET (N-Channel)", Manufacturer_Name=Vishay, Mouser Part Number=781-2N7002, Datasheet Link=https://www.diodes.com/assets/Datasheets/ds11303.pdf, Height=1.2mm, Manufacturer_Part_Number=2N7002, Mouser Price/Stock=https://www.mouser.co.uk/ProductDetail/Vishay-Siliconix/2N7002?qs=xBpwZ0JX2zKeuvZKtdYLZQ%3D%3D
R1 R2 R3 R4 R5 R6 R7 R8 R9 R10 R11 R12 R13 R14 R15 R16 R17 R18 R19 R21 R22 R23 R24 R25 R26 R27 R28 R30 R31 R32 R34 R35 R36 R37 R38 R39 R40 R41 R44 R46 R55: library part CMP-2003-02213-1, Manufacturer="Vishay Dale", Part Number=CRCW120647K0FKEA
R20 R29 R42 R43 R45 R47 R49 R50 R51 R52 R53 R54: library part RES, Manufacturer="Vishay Dale", Part Number=CRCW120647K0FKEA
R33: library part CMP-2003-02213-1, Manufacturer="Vishay Dale", Part Number=CRCW120647K0FKEA
Y1: "Crystal or Oscillator", Manufacturer_Name=ECS, Mouser Part Number=520-ECS160-18-4X-CKM, Datasheet Link=https://www.mouser.be/datasheet/2/122/hc-49usx-791.pdf, Height=3.5mm, Manufacturer_Part_Number=ECS-160-18-4X-CKM, Mouser Price/Stock=https://www.mouser.co.uk/ProductDetail/ECS/ECS-160-18-4X-CKM?qs=7MVldsJ5UawYqyimirccKw%3D%3D

## Via types
v1: diameter 36, hole 18, Top Layer to Bottom Layer, 84 vias
v2: diameter 125.98, hole 125.98, Top Layer to Bottom Layer, 2 vias

## Nets (pads, with @x,y where several pads share a name; then routed paths per layer and width w, separated by ;. In a path a pad name is that pad's centre, name@x,y a point inside that pad or via, vN(x,y) a via of type N, cw(c..) or ccw(c..) an arc to the next point about the centre after c; other vN are vias at no path point)
+3V3: C1.20 C1.38 R20.1 R51.1 R52.1 R53.1 R54.1 | length 4513.5
  Top Layer w15: R53.1 R52.1 1052.22,2889.34 1077.66,2889.34 1258,2709 1359,2709 1442,2626 ; v1(1059.4,3133.4) 1060.2,3134.2 1060.2,3271.2 1061,3272 1060,3273 v1(1061,3274) 1061,3439 1202,3580 1861.47,3580 ; C1.38 1861.47,3580 ; R20.1 2087.56,1957 2007,1957 1555,1957 1362.8,2149.2 C1.20 1442,2278.06 1442,2626 ; 1442,2626 1442,3160.53 1861.47,3580
  Bottom Layer w15: R54.1 1042.11,3145 1053.72,3133.4 v1(1059.4,3133.4) ; R51.1 v1(1061,3274)
+5V: C1.40 C3.1 C8.1 C9.1 D2.1 D13.3 IC3.8 IC4.3 IC5.18 J1.5 J1.6 J1.7 J1.8 J1.11 J1.12 L1.1 Q1.3 Q2.3 Q11.3 R1.2 R4.2 R7.2 R34.2 R42.2 R50.1 RN3.10 RN3.POLE2 RN4.POLE1 RN?.POLE1 | length 2648.5
  Top Layer w15: v1(559,586) 560,587 RN4.POLE1 ; IC5.18 748,3243 v1(752.44,3247.44) ; R50.1 v1(752.44,3247.44) ; C9.1 793,3288 v1(752.44,3247.44) ; v1(1422,1121) 1424.28,1118.72 D13.3 ; v1(1718,872) 1718,805.81 RN3.10 1745.38,795 1806.38,734 1806.38,637.38 1768,599 1768,591 2005.81,591 RN?.POLE1 ; L1.1 2086.79,4424.17 C3.1@2102.91,4408.05 ; D2.1 2104.88,4303.78 C3.1 2102.91,4401.97 C3.1@2102.91,4408.05 ; R1.2 C3.1@2102.91,4408.05 ; R7.2 2414.09,1417.81 2495.28,1499 v1(2506.77,1499) 2512,1499 2555,1542 R4.2 ; v1@2512,1682 v1(2509,1679) 2591.14,1679 R42.2 ; R34.2 3068.09,3080 3078.09,3070 v1(3090,3070) ; IC3.8 3202.94,2834.06 v1(3203,2834)
  Bottom Layer w15: J1.5 J1.7 J1.6 ; J1.12 J1.11 J1.6 ; J1.8 J1.6
+15V: 1.2 C4.1 IC1.7 J1.3 J1.4 J1.10 J1.26 R27.2 R55.2 | length 5439.1
  Top Layer w15: R55.2 v1(1607.09,4457.09) ; v1(1840,4460) 1842.04,4457.96 1842.04,4398.04 R27.2 1847.18,4392.91 1847.18,4348.82 2006,4190 2644,4190 2931,4477 1.2@2931,4657 ; IC1.7 C4.1@2629.88,4685 ; C4.1 C4.1@2652.88,4695.12 ; C4.1@2654,4694 1.2 2985,4694 3858.52,3820.48 J1.3 3784,3675.88 3784,3518.4 3717.64,3452.04 3701.04,3452.04 J1.10 ; 1.2@2863.24,4660.24 2927.76,4660.24 1.2@2931,4657 ; 1.2@2930.5,4689.5 2931,4689 1.2@2931,4657 ; J1.26 3782.11,2886.59 3896.59,2886.59 3940,2930 3940,3674.4 J1.4
  Bottom Layer w15: v1(1607.09,4457.09) 1610,4460 1611.46,4458.54 1838.54,4458.54 v1(1840,4460) ; J1.3 J1.4
DIFF_N: IC4.6 J1.41 R49.1 | length 4253
  Bottom Layer w15: IC4.6 517,2748 504.5,2735.5 504.5,2707 ; R49.1 571,2640.5 504.5,2707 ; J1.41 3543.56,2118.15 3534.77,2109.36 3408.36,2109.36 3074,1775 725,1775 504.5,1995.5 504.5,2707
DIFF_P: H6.1 IC4.7 J1.45 | length 4244.9
  Bottom Layer w15: H6.1 412.29,2671.29 442.29,2671.29 479.5,2708.5 ; IC4.7 467,2748 479.5,2735.5 479.5,2708.5 ; J1.45 3543.56,2075.57 3534.77,2084.36 3418.71,2084.36 3084.36,1750 714.64,1750 479.5,1985.14 479.5,2708.5
GND: C1.39 C3.2 C4.2 C5.1 C6.1 C7.1 C8.2 C9.2 C10.2 C11.2 D1.2 D-1.2 D-2.2 D-3.2 IC1.6 IC2.2 IC3.4 IC4.2 IC4.8 IC5.9 IC6.2 J1.31 J1.32 J2.12 Q3.4 Q4.2 Q4.4 Q5.2 Q6.2 Q7.2 Q8.2 Q9.2 Q10.2 Q12.2 Q12.4 R2.1 R3.1 R11.1 R16.1 R18.1 R19.1 R24.1 R29.1 R30.1 R32.1 R33.1 R35.1 R36.1 R38.1 R41.1 R46.1 R47.2 | length 1034.7
  Top Layer w15: C1.39 2077.36,3709.14 2191.44,3823.22 R29.1 ; D-1.2 2341.64,1970.5 2341.64,2132.5 D-2.2 ; J1.31 J1.32
  Bottom Layer w15: C8.2 313.84,2808.88 357.5,2765.23 v1(367,2765.23) IC4.8 417,2844.35 467,2894.35 IC4.2
Net1_1: 1.1 J1.1 J1.2 J2.14 | length 6171.8
  Top Layer w15: v1(90,2224) v1(90,4162) ; 1.1 3485.96,3808 J1.1
  Bottom Layer w15: v1(90,2224) 90,2117.22 J2.14 ; v1@90,4164 253,4327 2366,4327 2885,3808 1.1 ; J1.1 J1.2
NetC1_10: C1.10 IC5.16 R51.2 | length 940.6
  Top Layer w15: IC5.16 593.5,3240.5 593.5,3175.5 v1(596,3173)
  Bottom Layer w15: v1(596,3173) 793.92,3173 R51.2@881.14,3260.22 ; R51.2 R51.2@881.14,3260.22 ; C1.10 1240.5,3088 1184,3088 1063,3209 946.14,3209 905.14,3250 891.36,3250 R51.2@881.14,3260.22
NetC1_11: C1.11 IC5.13 R54.2 | length 1072.6
  Top Layer w15: v1(440,3149) 440.5,3149.5 440.5,3242.5 IC5.13
  Bottom Layer w15: v1(440,3149) 441.51,3149 459.29,3131.22 R54.2@879.14,3131.22 ; R54.2 R54.2@879.14,3131.22 ; C1.11 1186.88,3055 969.14,3055 903.14,3121 889.36,3121 R54.2@879.14,3131.22
NetC1_12: C1.12 IC5.15 R52.2 | length 990.3
  Top Layer w15: IC5.15 541,3154 609,3086 948.08,3086 1028.22,3005.86 R52.2 1149.14,3005.86 1312.88,2842.12 C1.12
NetC1_13: C1.13 IC5.14 R53.2 | length 1089.3
  Top Layer w15: IC5.14 491,3138 569,3060 867.08,3060 921.22,3005.86 R53.2 948.78,3005.86 1002.64,2952 1116.65,2952 1306.8,2761.85 1313.15,2761.85 C1.13
NetC1_14: C1.14 C1.35 D6.3 R28.2 R32.2 | length 1830.3
  Top Layer w15: C1.35 1977.04,3362.69 R28.2@2091.91,3247.81 ; R28.2 R28.2@2091.91,3247.81 ; R32.2 2519.13,3151 2446.13,3224 D6.3 2437.28,3272.72 2396,3314 2169.91,3314 2117.88,3261.96 2106.07,3261.96 R28.2@2091.91,3247.81
  Bottom Layer w15: C1.14 1640,2995.74 1640,3098.69 C1.35
NetC1_15: C1.15 J1.35 | length 3519.9
  Top Layer w15: v1(1401,2044) 1546,1899 3010,1899 3413,2302 3413,2491.57 3498.43,2577 3772.08,2577 J1.35
  Bottom Layer w15: C1.15 1401,2494.43 v1(1401,2044)
NetC1_16: C1.16 D5.3 R17.2 R19.2 | length 1104.6
  Top Layer w15: D5.3 1015.35,2348.55 ; R17.2 1078.09,2285.81 1015.35,2348.55 ; R19.2 1084.09,2785.19 1015.35,2716.45 v1(1015.35,2516) 1015.35,2348.55
  Bottom Layer w15: v1(1015.35,2516) 1021.03,2516 1041.37,2495.66 C1.16
NetC1_17: C1.17 D4.3 R15.2 R18.2 | length 1110.1
  Top Layer w15: D4.3 804,2736.13 753,2787.13 v1(753,2808) 753,2922.09 803.04,2972.12 803.04,2983.93 817.19,2998.09 R15.2 ; v1(1078,2711) 1079.54,2709.46 1079.54,2628.54 R18.2 1081.09,2615.19 1282.57,2413.71 1308.49,2413.71 C1.17
  Bottom Layer w15: v1(753,2808) 981,2808 v1(1078,2711)
NetC1_21: C1.21 R20.2 | length 380.7
  Top Layer w15: C1.21 2003.09,2051 2099.86,2051 2171.86,1979 2185.64,1979 2195.86,1968.78 R20.2
NetC1_26: C1.26 H1.1 | length 1674.1
  Bottom Layer w15: C1.26 2056.84,2583.16 2163.42,2476.58 2163.42,2116.58 2330,1950 2610,1950 H1.1
NetC1_28: C1.28 R37.1 R38.2 | length 700.2
  Top Layer w15: C1.28 1941.19,2719.2 1941.19,2667.81 2022,2587 2022,2395.64 2089.83,2327.81 R37.1 2090.87,2314.96 2090.87,2135.04 R38.2
NetC1_29: C1.29 R26.1 R30.2 | length 696.3
  Top Layer w15: C1.29 1976,2771 1976,2701 2085.91,2591.09 R26.1@2085.91,2513.81 ; R26.1 R26.1@2085.91,2513.81 ; R30.2 2342.91,2538.85 2328.76,2553 2125.1,2553 R26.1@2085.91,2513.81
NetC1_30: C1.30 D8.3 R40.2 R41.2 | length 2904.6
  Top Layer w15: v1(578,2298) 578,2292.32 560,2274.32 560,1650 600,1610 R41.2 692.91,1621.81 732.07,1660.96 922.9,1660.96 969.87,1614 D8.3 980.82,1611.91 980.82,1439.09 R40.2
  Bottom Layer w15: v1(578,2298) 899.46,2619.46 1414.46,2619.46 1724.61,2929.61 C1.30
NetC1_32: C1.32 J1.18 | length 2445.1
  Top Layer w15: v1(2827,3522) v1(3146,3522) ; J1.18 3790,3209.44 v1(3790,3360)
  Bottom Layer w15: C1.32 2323.16,3522 v1(2827,3522) ; v1(3146,3522) 3168,3500 3721.78,3500 3790,3431.78 v1(3790,3360)
NetC1_33: C1.33 C5.2 R22.1 | length 1347.7
  Top Layer w15: C1.33 2017,3076.46 2017,2755.72 2088.91,2683.81 R22.1 2088.91,2660.19 2103.07,2646.04 2149.18,2646.04 2186.22,2609 2351.78,2609 2403,2557.78 2403,2471 2571,2303 C5.2
NetC1_34: C1.34 C6.2 R31.1 | length 492.7
  Top Layer w15: C1.34 2081.79,3098.28 2081.79,3070.09 C6.2 2093.91,3046.03 R31.1
NetC1_36: C1.36 R25.1 R29.2 | length 1385.9
  Top Layer w15: R25.1 2082.14,3834 R29.2
  Bottom Layer w15: C1.36 2007,3552.3 v1(2007,3835) v1@2010,3838
NetC1_37: C1.37 D3.3 R14.2 R16.2 | length 656.7
  Top Layer w15: C1.37 1984.06,3535.91 2081.14,3633 2087.15,3633 2091.46,3628.69 2091.46,3423.46 R14.2 ; D3.3 2276.64,3633 2291.83,3617.81 R16.2
NetC2_1: C2.1 D1.1 IC1.8 L1.2
NetC2_2: C2.2 IC1.1 | length 146.6
  Top Layer w15: C2.2 2245.12,4784.88 2270,4760 2270,4738.23 IC1.1
NetC7_2: C7.2 IC3.3 R36.2 R39.1 | length 1321.5
  Top Layer w15: R39.1@2616.91,2927.19 2631.07,2913.04 2631.07,2907.93 2650.96,2888.04 2732.96,2888.04 2865.68,2755.32 IC3.3 ; R39.1 2687.93,3010.02 2687.93,3297.97 2728.12,3338.16 2728.12,3357.84 2629.09,3456.87 R36.2 2628.54,3603.54 2628.54,3783.46 v1@2628,3784
  other v1: 2626.77,3785.23
NetC10_1: C10.1 IC5.7 Y1.1 | length 541.4
  Top Layer w15: IC5.7 391,3666 Y1.1 571,4010.16 530,4051.16 C10.1
NetC11_1: C11.1 IC5.8 Y1.2 | length 467.7
  Top Layer w15: IC5.8 341,3808.13 Y1.2 378.87,4055.76 C11.1
NetD2_2: D2.2 R3.2 | length 121.1
  Top Layer w15: D2.2 2350,4290
NetD3_1: D3.1 Q5.1 R14.1 | length 338.7
  Top Layer w15: D3.1 2180.55,3460.35 2207.09,3433.81 R14.1 2315.58,3422 2340.17,3446.59 Q5.1
NetD4_1: D4.1 Q6.1 R15.1 | length 633
  Top Layer w15: Q6.1 760,2621.27 D4.1@766.6,2627.87 ; D4.1@766.6,2645.58 D4.1 D4.1@766.6,2627.87 ; R15.1 840.81,2883.91 854.96,2869.76 854.96,2857.95 887,2825.91 887,2625.09 847.91,2586 808.46,2586 D4.1@766.6,2627.87
NetD5_1: D5.1 Q7.1 R17.1 | length 445.9
  Top Layer w15: Q7.1 756.6,2074.06 756.6,2257.6 D5.1 757,2249.14 791.14,2215 904.91,2215 937.95,2248.04 949.76,2248.04 963.91,2262.19 R17.1
NetD6_1: D6.1 Q8.1 R28.1 | length 444.4
  Top Layer w15: D6.1 2337.87,3261.4 2312.46,3236 R28.1 2206.09,3179.91 2348.66,3037.34 Q8.1
NetD7_1: D7.1 RN3.NO2 | length 1364.9
  Top Layer w15: D7.1 v1(510,310) ; v1(1525,495) RN3.NO2
  Bottom Layer w15: v1(510,310) 1340,310 v1(1525,495)
NetD7_2: D7.2 R33.2 | length 114.9
  Top Layer w15: D7.2 292.91,321.81 R33.2
NetD8_1: D8.1 Q10.1 R40.1 | length 336.9
  Top Layer w15: Q10.1 1008.83,1298.59 1014.12,1303.89 1014.12,1314.71 1082.93,1383.52 1082.93,1422.85 R40.1 1097.09,1448.81 1069.28,1476.62 D8.1
NetD9_1: D9.1 D14.3 Q11.2 RN4.1 RN4.NO1 | length 1383.7
  Top Layer w15: RN4.NO1 617.62,487 577.62,527 D9.1 505,612.1 505,717 575,787 RN4.1 694,787 706.18,799.19 706.18,845.85 876,1015.66 Q11.2 936,956 1158.13,956 1206,1003.87 D14.3
NetD9_2: D9.2 R47.1 | length 89
  Top Layer w15: D9.2 282.1,581.76 296.56,596.22 R47.1
NetD11_1: D11.1 Q3.5 RN2.10 | length 1234.1
  Top Layer w10: Q3.5@2173,1392 2239,1326 2439.67,1326 2548,1217.67 2548,1113 2548.54,1113 2563.4,1098.13 D11.1
  Top Layer w15: D11.1 2563.4,1080.42 2860.82,783 RN2.10
NetD11_3: D11.3 Q1.2 RN2.1 RN2.NO1 | length 1179.4
  Top Layer w15: D11.3 2526,840 v1(2582,784) 2582.5,783.5 2706.31,783.5 RN2.1 ; v1(2583,482) 2584,483 RN2.NO1
  Bottom Layer w15: v1(2583,482) 2582.5,482.5 2582.5,783.5 v1(2582,784) 2656.34,784 2879,1006.66 Q1.2
NetD12_1: D12.1 Q4.5 RN?.10 | length 1162.4
  Top Layer w10: Q4.5@1585,1389 1668,1389 1853,1204 2142.42,1204 2296.61,1049.81 2296.61,1049.27 2320.61,1025.27 2320.61,1016.41 2327.42,1009.6 D12.1
  Top Layer w15: D12.1 2345.13,1009.6 2349.44,1005.29 2349.44,996.43 2386.19,959.68 RN?.10
NetD12_3: D12.3 Q2.2 RN?.1 RN?.NO1 | length 1187.1
  Top Layer w10: Q2.2 1948,1029 1960,1029 2026,1095 2188.87,1095 2236.87,1047 D12.3
  Top Layer w15: v1(1875,782) 1877.5,784.5 2007.31,784.5 RN?.1 ; v1(1876,489) 1878,487 RN?.NO1
  Bottom Layer w15: v1(1876,489) 1875.5,489.5 1875.5,781.5 v1(1875,782) 1948,855 Q2.2
NetD13_1: D13.1 Q10.3 RN3.1 | length 680.4
  Top Layer w15: Q10.3 1167.47,1260.8 D13.1@1324.87,1103.4 ; RN3.1 1298.19,795 1286,807.19 1286,1064.54 D13.1@1324.87,1103.4 ; D13.1 D13.1@1324.87,1103.4
NetD14_1: D14.1 Q12.5 RN4.10 | length 1222.8
  Top Layer w15: Q12.5 880.85,1388 920,1348.85 920,1187 1086,1021 1087,1021 1099,1009 v1(1099,1004) ; RN4.10 1186,787 1248,849 1248,866 1243.4,870.6 D14.1
  Bottom Layer w15: v1(1099,1004) 1099,1002.72 1127,974.72 v1(1127,789)
NetD-1_1: D-1.1 J1.14 R21.2 R23.2 | length 2969.1
  Top Layer w15: D-1.1 2526,1970 2687,2131 2687,2440.1 2624.91,2502.19 R21.2 2624.91,2573.17 2479.05,2719.04 2467.24,2719.04 2453.09,2733.19 R23.2 2454.2,2743.89 v1@2537.22,2743.89 ; v1(2831,3341) 3098,3341 v1(3138,3301)
  Bottom Layer w15: v1@2537.22,2743.89 2469,2812.1 2469,3245 2565,3341 v1(2831,3341) ; v1(3138,3301) 3178,3341 3638,3341 J1.14
  other v1: 2535.72,2745.39
NetD-2_1: D-2.1 J1.21 R31.2 | length 2591.9
  Top Layer w15: v1(2293,2868) 2292,2867 R31.2 2208.09,2768.91 2294,2683 2317,2683 2320,2680 2394.95,2680 2496.24,2578.71 2496.24,2503.76 2552,2448 v1(2552,2444) ; v1(2425,2868) v1(2540,2868) 2543,2865 2613.38,2865 2615.34,2863.04 2707.96,2863.04 2918,2653 3233.56,2653 J1.21 ; D-2.1 2449.55,2131.89 v1@2551.22,2131.89
  Bottom Layer w15: v1(2293,2868) v1(2425,2868) ; v1@2551.22,2131.89 2551.61,2132.28 2551.61,2443.61 v1(2552,2444)
  other v1: 2549.72,2133.39
NetD-3_1: D-3.1 J1.9 J1.25 R39.2 | length 1577.2
  Top Layer w15: v1(2730,3060) 2730,2961.91 2742,2949.91 R39.2 ; v1@2846,3163 3080.66,3163 3133.22,3110.44 D-3.1 v1(3218.56,3110.44) J1.9
  Bottom Layer w15: v1(2730,3060) v1(2830,3160) ; v1(3218.56,3110.44) 3224.24,3110.44 3529.16,2805.52 J1.25
NetH7_1: H7.1 R49.2 | length 307
  Top Layer w15: H7.1 433,2520 474,2479 v1(630.28,2479)
  Bottom Layer w15: R49.2 629.14,2480.14 v1(630.28,2479)
NetH?_1: H2.1 J1.43 J1.44 R43.1 | length 2135
  Top Layer w15: R43.1 3014.44,1564.78 3024.66,1575 3035,1575 3405.95,1945.95 3725.95,1945.95 3790,2010 3790,2107.08 J1.43 J1.44
  Bottom Layer w15: H2.1 3160.1,2240 3794.12,2240 J1.43
NetIC1_4: IC1.4 R1.1 R2.2 | length 177.4
  Top Layer w15: R1.1 R2.2 2282.91,4579.7 2277.62,4585 IC1.4
NetIC2_1: IC2.1 J1.13 R27.1 | length 2925.4
  Top Layer w15: IC2.1 1817.2,4545 1729.91,4457.71 R27.1 1739.93,4385.99 1739.93,4349.07 1936,4153 3307,4153 3610,3850 3610,3344.4 J1.13
NetIC3_1: IC3.1 Q9.1 R37.2 | length 1095.6
  Top Layer w15: R37.2 2204,2327.81 2218.15,2341.96 2229.96,2341.96 2249,2361 Q9.1 2358,2364 v1(2358,2426) ; v1(2840,2834) 2840.06,2834.06 IC3.1
  Bottom Layer w15: v1(2358,2426) 2466,2534 2728,2534 2840,2646 v1(2840,2834)
NetIC3_2: IC3.2 R34.1 R35.2 | length 519.3
  Top Layer w15: IC3.2 2937.96,2800.96 2967.63,2800.96 2993.79,2827.12 2993.79,2863.21 2982,2875 2873,2875 2855,2893 2855,2947.81 2904.19,2997 R35.2 2916.46,2997.46 3035.54,2997.46 R34.1
NetIC4_1: IC4.1 IC5.1 | length 1037.9
  Top Layer w15: v1(347,3392) 495.85,3392 671.65,3567.8 671.65,3568.14 691,3587.49 IC5.1
  Bottom Layer w15: v1(347,3392) 347,3391 346,3391 236,3281 236,3067 324.23,2978.77 IC4.1
NetIC4_4: IC4.4 IC5.2 | length 1112.1
  Top Layer w15: v1(343,3088) 341,3088 240,3189 240,3356 325,3441 494.85,3441 621.65,3567.8 621.65,3568.14 641,3587.49 IC5.2
  Bottom Layer w15: v1(343,3088) 475.34,3088 547.65,3015.68 547.65,3015.35 567,2996 IC4.4
NetIC5_17: IC5.17 R50.2 | length 104.1
  Top Layer w15: IC5.17 643.57,3240.43 643.57,3143.57 R50.2
NetIC6_1: IC6.1 J1.17 R55.1 | length 3365.6
  Top Layer w15: IC6.1 1578.54,4542.6 1492.91,4456.97 R55.1 1492.91,4388.19 1507.07,4374.04 1518.88,4374.04 1772.91,4120 3250,4120 v1(3270,4100) ; v1(3430,4100) 3640,3890 3640,3216.92 J1.17
  Bottom Layer w15: v1(3270,4100) v1(3430,4100)
NetJ1_15: J1.15 J1.16 | length 157.5
  Bottom Layer w15: J1.15 J1.16
NetJ1_22: J1.22 Q5.3 | length 1740
  Top Layer w15: Q5.3 2515.8,3408.8 v1(2517,3410) ; v1(2830,3410) 3105.5,3410 v1(3139,3376.5)
  Bottom Layer w15: v1(2517,3410) v1(2830,3410) ; v1(3139,3376.5) 3140.37,3375.13 3694.87,3375.13 3760,3310 3760,3290.67 cw(c3701.04,3277.96) 3760,3265.25 3760,3133.19 cw(c3701.04,3120.48) 3760,3107.77 3760,3021.96 J1.22
NetJ1_24: J1.24 R26.2 | length 2823.3
  Top Layer w15: R26.2 2200.09,2490.19 2250.28,2440 v1(2270,2440)
  Bottom Layer w15: v1(2270,2440) 2270,2140 2390,2020 2510,2020 2900,2410 3863.26,2410 3940,2486.74 3940,2887 J1.24
NetJ1_29: J1.29 Q8.3 R23.1 | length 1555
  Top Layer w15: R23.1 2338.91,2843.91 2415.22,2920.22 2415.22,2958.7 2420.51,2964 Q8.3 2433.34,2962 2533,2962 2535,2960 2589,3014 v1(2634.5,3014) v1@2638,3014
  Bottom Layer w15: v1(2634.5,3014) 2635.91,3012.59 3179.01,3012.59 J1.29
  other v1: 2533.5,2961.5
NetJ1_33: J1.33 Q9.3 | length 1258
  Top Layer w15: Q9.3 2448.5,2323.2 2543.71,2228 v1(2616,2228) v1@2616,2229
  Bottom Layer w15: v1(2616,2228) 2616,2233 2621,2233 2878.56,2490.56 J1.33
NetJ1_34: J1.34 R12.2 | length 3578
  Top Layer w15: R12.2 v1(1131,2460) ; v1(1133,2041) 1133,1963.79 1226.79,1870 3022,1870 3441,2289 3441,2484.21 3507.66,2550.87 3640.72,2550.87 J1.34
  Bottom Layer w15: v1(1131,2460) 1133,2458 1132,2457 1132,2042 v1(1133,2041)
NetJ1_38: J1.38 R13.2 | length 3293.7
  Top Layer w15: R13.2 1076.09,2075.19 989,1988.1 989,1882 1031,1840 3036,1840 3478,2282 3478,2372 3519,2413 3621.12,2413 J1.38
NetJ1_39: J1.39 Q7.3 R13.1 | length 3559.6
  Top Layer w15: Q7.3 904.39,2156.34 961.91,2098.81 R13.1 961.91,1867.09 1018,1811 3047.64,1811 3504.64,2268 3793.44,2268 J1.39
NetJ1_40: J1.40 Q6.3 R12.1 | length 4229.1
  Top Layer w15: Q6.3 895.05,2541.68 964.91,2471.81 R12.1 v1(904,2460) ; v1(901,2038) 902,2037 901,2036 901,1886 1001,1786 3058,1786 3508,2236 3918.92,2236 J1.40
  Bottom Layer w15: v1(901,2038) 902.5,2039.5 902.5,2455.5 901,2457 v1(904,2460)
NetJ1_42: J1.42 J2.9 J2.10 RN4.NC2 | length 6899.8
  Top Layer w15: v1(431,1719) 409.48,1719 J2.9 J2.10 88,1661.22 88,327 216,199 970,199 1206,435 1206,614 1133,687 RN4.NC2 ; v1(606,1716) 609,1719 1715,1719 1753,1757 3142,1757 3494,2109 3649,2109 3701.04,2161.04 J1.42
  Bottom Layer w15: v1(431,1719) 603,1719 v1(606,1716)
NetJ1_46: J1.46 J1.48 J2.5 J2.6 RN4.NO2 | length 6507.2
  Top Layer w15: v1(430,1654) J2.5 J2.6 236.6,1652.34 178.34,1652.34 124,1598 124,351 236,239 642,239 890,487 RN4.NO2 ; v1(606,1667) 607.2,1667 631.2,1691 1725.5,1691 1764.5,1730 3151,1730 3505,2084 3645.44,2084 3701.04,2028.4 J1.46
  Bottom Layer w15: v1(430,1654) 434,1654 447,1667 v1(606,1667) ; J1.46 3701.04,2032.57 3768.47,2100 3934.12,2100 J1.48
NetJ1_47: J1.47 R10.2 | length 1682.4
  Top Layer w15: R10.2 v1(2506,1560)
  Bottom Layer w15: v1(2506,1560) 3203,1560 3430.43,1787.43 3430.43,1874.79 3509.64,1954 3794.4,1954 J1.47
NetJ1_49: J1.49 RN3.NO1 | length 3689.9
  Top Layer w15: RN3.NO1 1369,495 1579,285 3123,285 v1(3548,710)
  Bottom Layer w15: J1.49 3617,1787.2 3617,779 v1(3548,710)
NetJ1_50: J1.50 RN2.NO2 | length 1663.3
  Top Layer w15: RN2.NO2 3095.37,495.19 3146.19,495.19 3617,966 3617,1776.6 J1.50
NetJ1_52: J1.52 RN?.NC1 | length 3458.9
  Top Layer w15: RN?.NC1 2184,687 v1(2185,688)
  Bottom Layer w15: v1(2185,688) 2185,404 2305,284 3234,284 3920,970 3920,1764.64 J1.52
NetJ1_53: J1.53 RN2.POLE2 | length 1329
  Top Layer w15: RN2.POLE2 3114.21,583 3126.4,595.19 3126.4,616.4 3543.56,1033.56 J1.53
NetJ1_54: J1.54 R4.1 R5.2 R6.2 | length 1868.9
  Top Layer w15: R4.1 2702.04,1538.96 2702.04,1398.04 R6.2 ; R5.2 2702.54,1229.54 2702.54,1391.46 R6.2 ; J1.54 3780.9,1783.02 3780.9,1879.1 3739.05,1920.95 3421.95,1920.95 3066,1565 3066,1528.6 3012.4,1475 2831,1475 2751,1395 R6.2
NetJ1_55: J1.55 R8.2 | length 1250.2
  Top Layer w15: R8.2 3081,1396 v1(3083,1398)
  Bottom Layer w15: v1(3083,1398) 3475,1790 3475,1884 3520,1929 3587,1929 3618,1898 3618,1829 3660,1787 3765,1787 3848.84,1703.16 J1.55
NetJ1_56: J1.56 R44.1 R45.2 R46.2 | length 6101.5
  Top Layer w15: R46.2 R46.2@294.91,711.81 ; R44.1 298.91,1071.19 v1(246,1018.28) 246,760.72 R46.2@294.91,711.81 ; R45.2 403.86,864.22 393.64,854 392.95,854 294.91,755.96 R46.2@294.91,711.81
  Bottom Layer w15: v1(246,1018.28) 246,444 490,200 3190,200 3950,960 3950,1637.16 J1.56
NetJ2_2: J2.2 J2.8 R44.2 RN4.POLE2 | length 1774
  Top Layer w15: R44.2 417.09,1087 v1(487,1087) ; v1(827,712) 827,683 916.01,593.99 923,587 RN4.POLE2
  Bottom Layer w15: J2.8 237.73,1732.21 195.21,1732.21 124,1661 124,1542 167.08,1498.92 235.86,1498.92 J2.2 238.26,1491.46 458,1271.72 458,1116 v1(487,1087) 827,747 v1(827,712)
NetJ2_3: J2.3 J2.4 R25.2 | length 4246.3
  Top Layer w15: J2.4 J2.3 ; v1(1016.73,4284.73) 1016.46,4284.46 1016.46,3836.46 R25.2
  Bottom Layer w15: J2.3 381,1639.26 381,1974 284,2071 181,2071 127,2125 127,4144 276,4293 1002.77,4293 1011.05,4284.73 v1(1016.73,4284.73)
NetQ1_1: Q1.1 R5.1 | length 296.5
  Top Layer w15: R5.1 2591.91,1214.19 2677.39,1128.72 2677.39,1108.61 Q1.1
NetQ2_1: Q2.1 R6.1 | length 893.4
  Top Layer w10: v1(2505,1392) 2581.83,1392 R6.1
  Bottom Layer w10: Q2.1 1990,1159 2261,1159 2494,1392 v1(2505,1392)
NetQ3_1: Q3.1 R7.1 | length 771.6
  Top Layer w10: Q3.1@1873,1492 2007,1626 2313.24,1626 2374,1565.24 2374,1491.9 2299.91,1417.81 R7.1
NetQ3_2: Q3.2 R10.1 | length 499.5
  Top Layer w10: Q3.2@1873,1392 2041,1560 R10.1
NetQ4_1: Q4.1 R9.1 | length 1507.5
  Top Layer w10: v1(2248,1236) 2295.91,1236 R9.1
  Top Layer w15: v1(1190,1490) 1191,1489 Q4.1
  Bottom Layer w15: v1@1191,1489 v1(1190,1490) 1274,1574 2164.21,1574 2248,1490.21 v1(2248,1236)
NetQ11_1: Q11.1 R42.1 R43.2 | length 2635.4
  Top Layer w15: v1(2506,1625) 2657.22,1625 R42.1@2699.44,1667.22 ; R42.1 R42.1@2699.44,1667.22 ; R43.2 2829.44,1551 2723.44,1657 2709.66,1657 R42.1@2699.44,1667.22
  Bottom Layer w15: Q11.1 1013,1253 1013,1546 1072,1605 2486,1605 v1(2506,1625)
NetQ12_1: Q12.1 R45.1 | length 712.2
  Top Layer w15: R45.1 297.56,891.78 352,946.22 352,1352 481.85,1481.85 481.85,1482.7 487.15,1488 Q12.1
NetR8_1: R8.1 R9.2 R11.2 | length 670.7
  Top Layer w15: R9.2 2424.09,1222 v1(2497,1222) ; v1(2813,1224) 2897.91,1224 R11.2 2902.41,1222.5 2902.41,1394.5 R8.1
  Bottom Layer w15: v1(2497,1222) 2498,1223 2812,1223 v1(2813,1224)
NetR21_1: R21.1 R22.2 R24.2 | length 769.4
  Top Layer w10: R22.2@2214.09,2661 2214.09,2650.15 2219.74,2644.5 v1(2326.65,2644.5)
  Top Layer w15: R22.2 R22.2@2214.09,2661 ; v1(2733,2642) 2735.09,2644.09 R24.2@2735.09,2733 ; v1@2737.09,2642 2737.09,2516 R21.1
  Bottom Layer w15: v1(2326.65,2644.5) 2329.15,2642 v1(2733,2642)
NetRN2_NC2: RN2.NC2 RN?.POLE2 | length 736.8
  Top Layer w15: RN?.POLE2 2503,587 2549,633 2995,633 3045,683 RN2.NC2
NetRN3_POLE1: RN3.POLE1 RN?.NO2 | length 1100.1
  Top Layer w15: RN3.POLE1 1456,595 1511,540 2295,540 2348,487 RN?.NO2
pads on no net: C1.1 C1.2 C1.3 C1.4 C1.5 C1.6 C1.7 C1.8 C1.9 C1.18 C1.19 C1.22 C1.23 C1.24 C1.25 C1.27 C1.31 D3.2 D4.2 D5.2 D6.2 D8.2 D11.2 D12.2 D13.2 D14.2 IC1.2 IC1.3 IC1.5 IC2.3 IC3.5 IC3.6 IC3.7 IC4.5 IC5.3 IC5.4 IC5.5 IC5.6 IC5.10 IC5.11 IC5.12 IC6.3 J1.19 J1.20 J1.23 J1.27 J1.28 J1.30 J1.36 J1.37 J1.51 J1.57 J1.58 J1.59 J1.60 J1.61 J1.62 J1.MH1 J1.MH2 J1.MH3 J1.MH4 J2.1 J2.7 J2.11 J2.13 Q3.3 Q3.6 Q4.3 Q4.6 Q12.3 Q12.6 RN2.5 RN2.6 RN2.NC1 RN2.POLE1 RN3.5 RN3.6 RN3.NC1 RN3.NC2 RN4.5 RN4.6 RN4.NC1 RN?.5 RN?.6 RN?.NC2
copper on no net:
  other v2: 110,110 120,5030

## Polygon pours and split planes (outlines as drawn)
GND on Top Layer "GND_L01_P002" (solid, remove dead copper, pour order 2): 100,4100 2000,4100 2003.09,4096.91 2003.09,2020 100,2020
GND on Top Layer "GND_L01_P008" (solid, pour order 8): 100,1600 100,100 3900,100 3900,1600
GND on Top Layer "GND_L01_P004" (solid, remove dead copper, pour order 4): 2100,4100 2100,2051.14 2148.86,2100 3900,2100 3900,4100
GND on Top Layer "GND_L01_P019" (solid, pour order 19): 238.29,4100 240,4101.71 240,4380 100,4380 100,4100
GND on Top Layer "GND_L01_P018" (solid, pour order 18): 100,4350 2220,4350 2220,4730 1850,4730 1850,5100 100,5100
GND on Top Layer "GND_L01_P016" (solid, pour order 16): 2320,4910 2320,4450 2180,4450 2180,4350 2430,4350 2430,4240 2540,4240 2540,4540 2700,4540 2700,4650 2420,4650 2420,4910
NetC2_1 on Top Layer "NETC2_1_L01_P015" (solid, pour order 15): 1920,4820 2040,4820 2040,4870 2310,4870 2310,4930 2430,4930 2430,4720 2530,4720 2530,4820 3190,4820 3190,4990 1920,4990
GND on Top Layer "GND_L01_P013" (solid, pour order 13): 450,2070 450,1560 540,1560 540,2070
GND on Top Layer "GND_L01_P011" (solid, pour order 11): 100,2070.56 100,1850 270,1850 270,1920 190,1920 190,2069.56
GND on Top Layer "GND_L01_P007" (solid, pour order 7): 2000,2100 2148.86,2100 2148.86,2048.86 2000,2048.86
GND on Top Layer "GND_L01_P006" (solid, pour order 6): 2000,3700 2100,3700 2100,3654.81 2054.81,3654.81 2000,3600
GND on Top Layer "GND_L01_P005" (solid, pour order 5): 1900,4100 2200,4100 2200,3900 1900,3900
GND on Top Layer "GND_L01_P003" (solid, pour order 3): 700,4390 700,4000 900,4000 900,4390
+5V on Bottom Layer "+5V_L02_P000" (solid, pour order 0): 100,5100 100,100 3900,100 3900,5100

## Silkscreen, mask and mechanical layers (free items; w line width, h text height)
Top Overlay:
  text "08/04/2021" at 1225.04,5053.14 h60
  text "MOTHERBOARD_TB3.1_REV2" at 310,5050.59 h60
  text "GOJO !" at 1450,3640 h60
Mechanical 1:
  lines w47: 0,-7.95 4140,-7.95 4140,5138.66 0,5138.66 0,-7.95
Mechanical 3:

## Text inside footprints (layer, text, board x,y; h text height)
C1: Top Overlay "STM32F401CCU6" at 1283.78,3891.49 h60
H1: Mechanical 3 "1" at 2936.78,2385.11 h47.6 r270
H2: Mechanical 3 "1" at 3077,2385 h47.6 r270
H6: Mechanical 3 "1" at 390.89,2760.22 h47.6 r180
H7: Mechanical 3 "1" at 398.89,2620.22 h47.6 r180